# Altium PCB Shield_robottino_PCB.PcbDoc
Units mm, origin at the board's own origin, x right, y up, seen from the top; angles counter-clockwise.
Board outline 50 x 50 mm, 4 copper layers (Top Layer, Internal Plane 1, Internal Plane 2, Bottom Layer); 44 components, 46 nets, 185 pads, 90 vias.
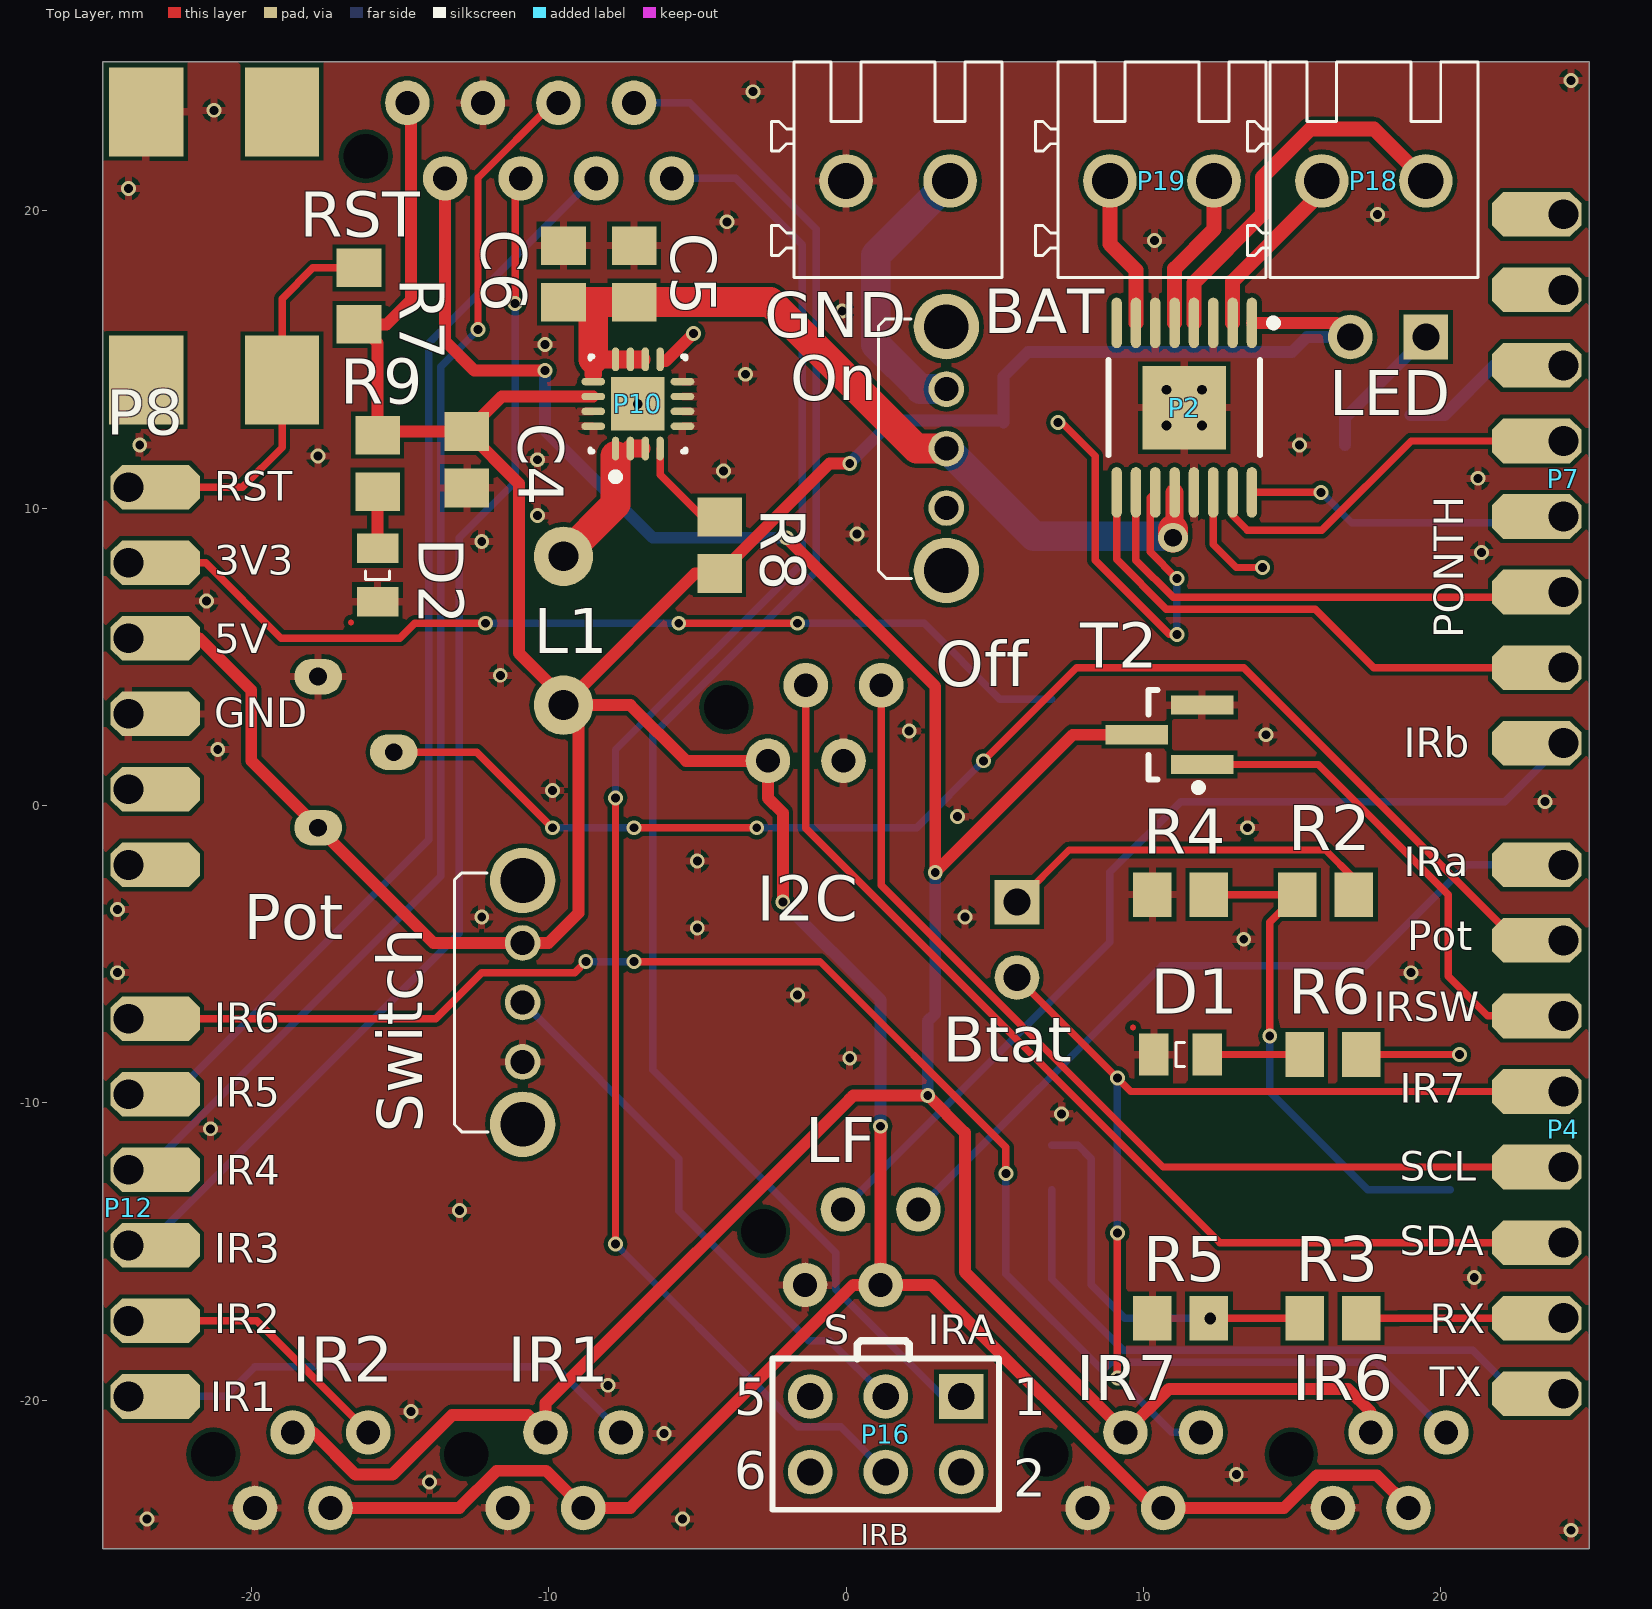
[diagram p0: Top Layer view]
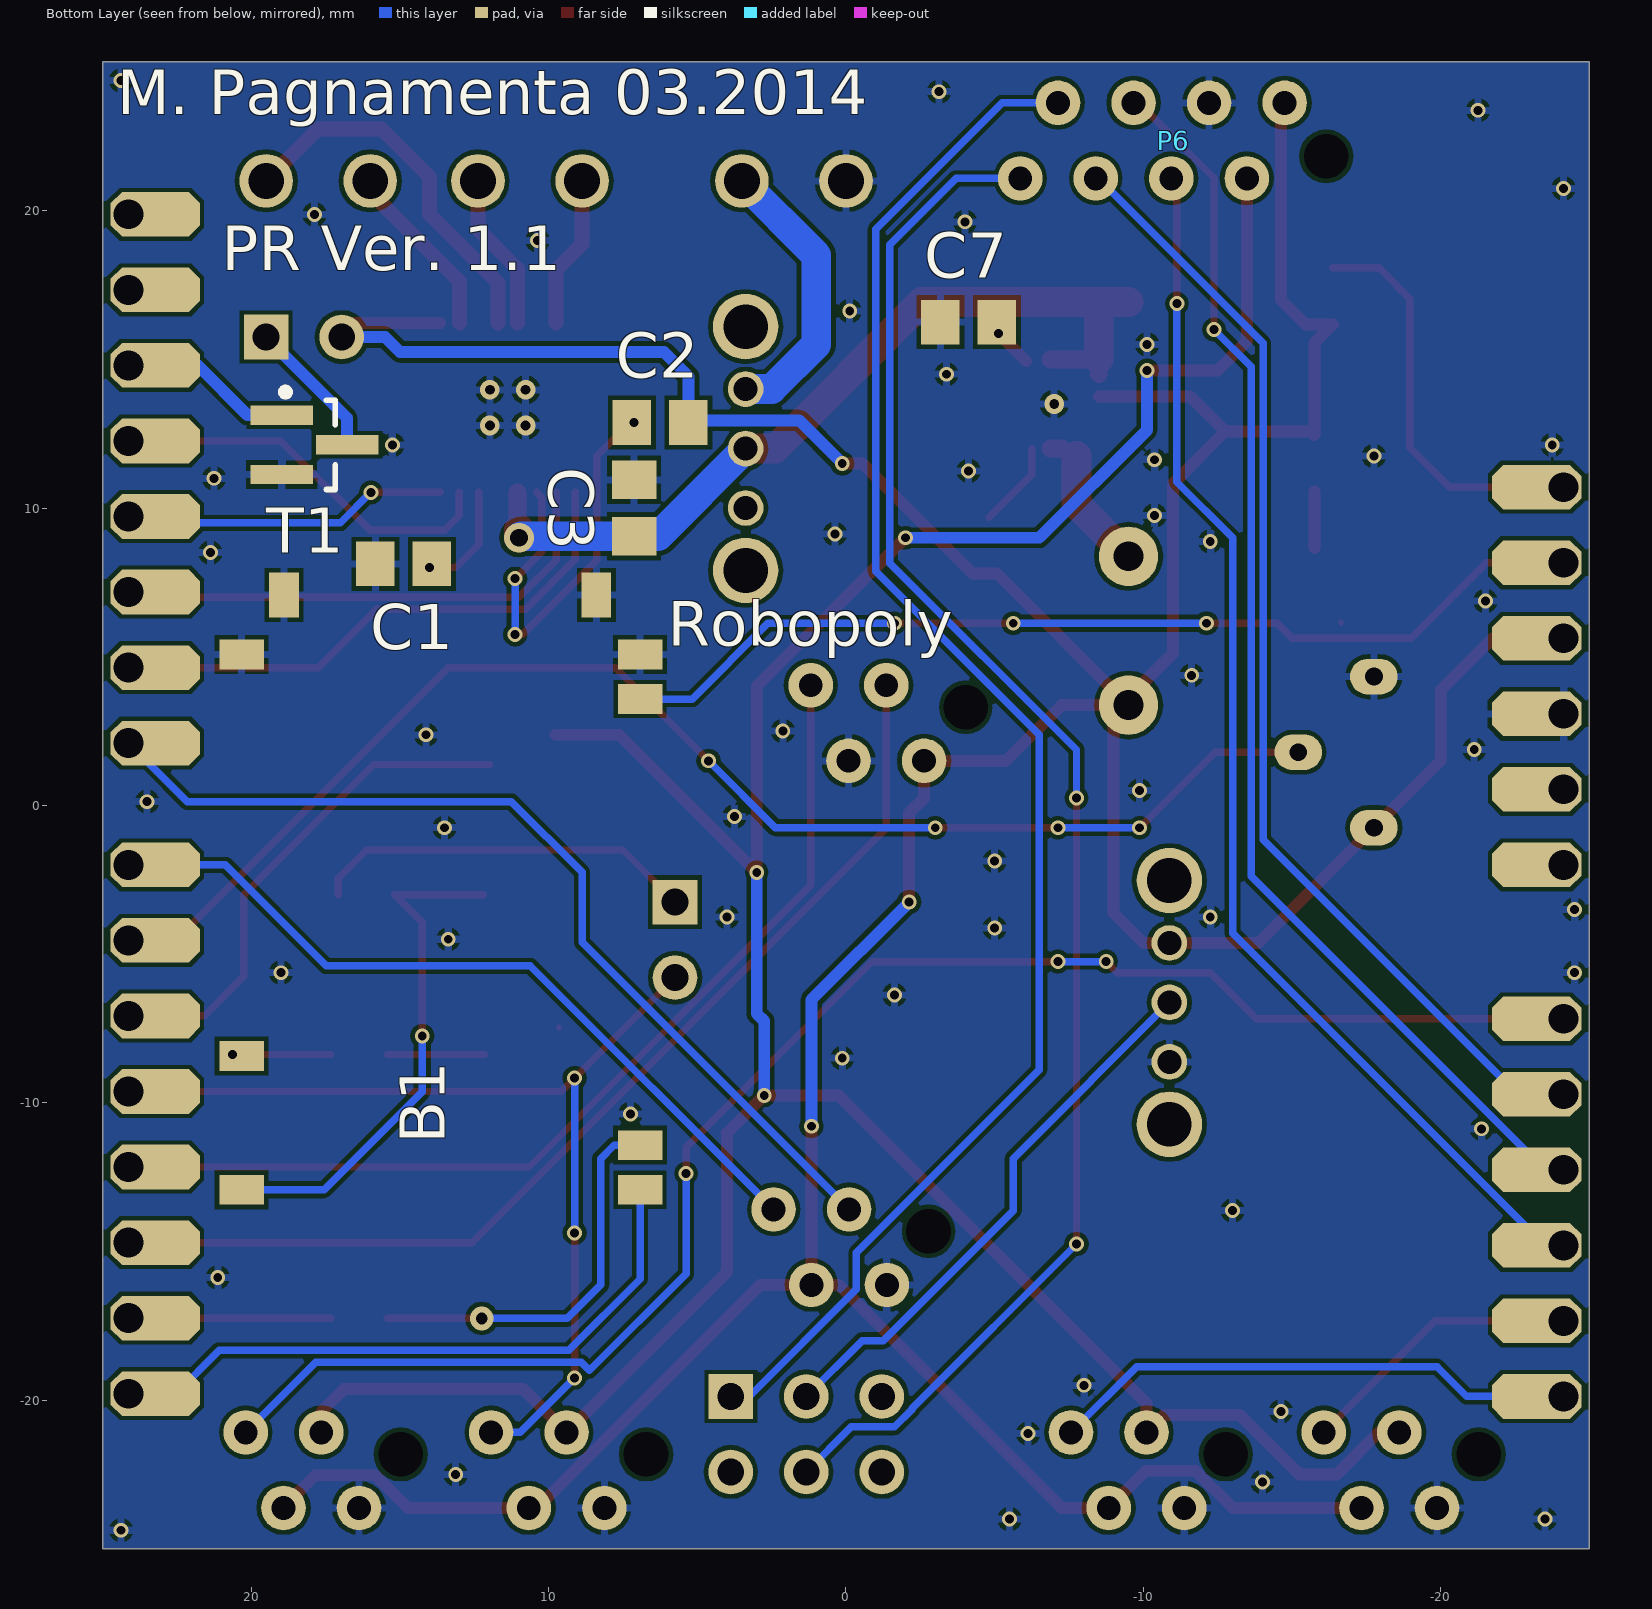
[diagram p1: Bottom Layer view, seen from below]
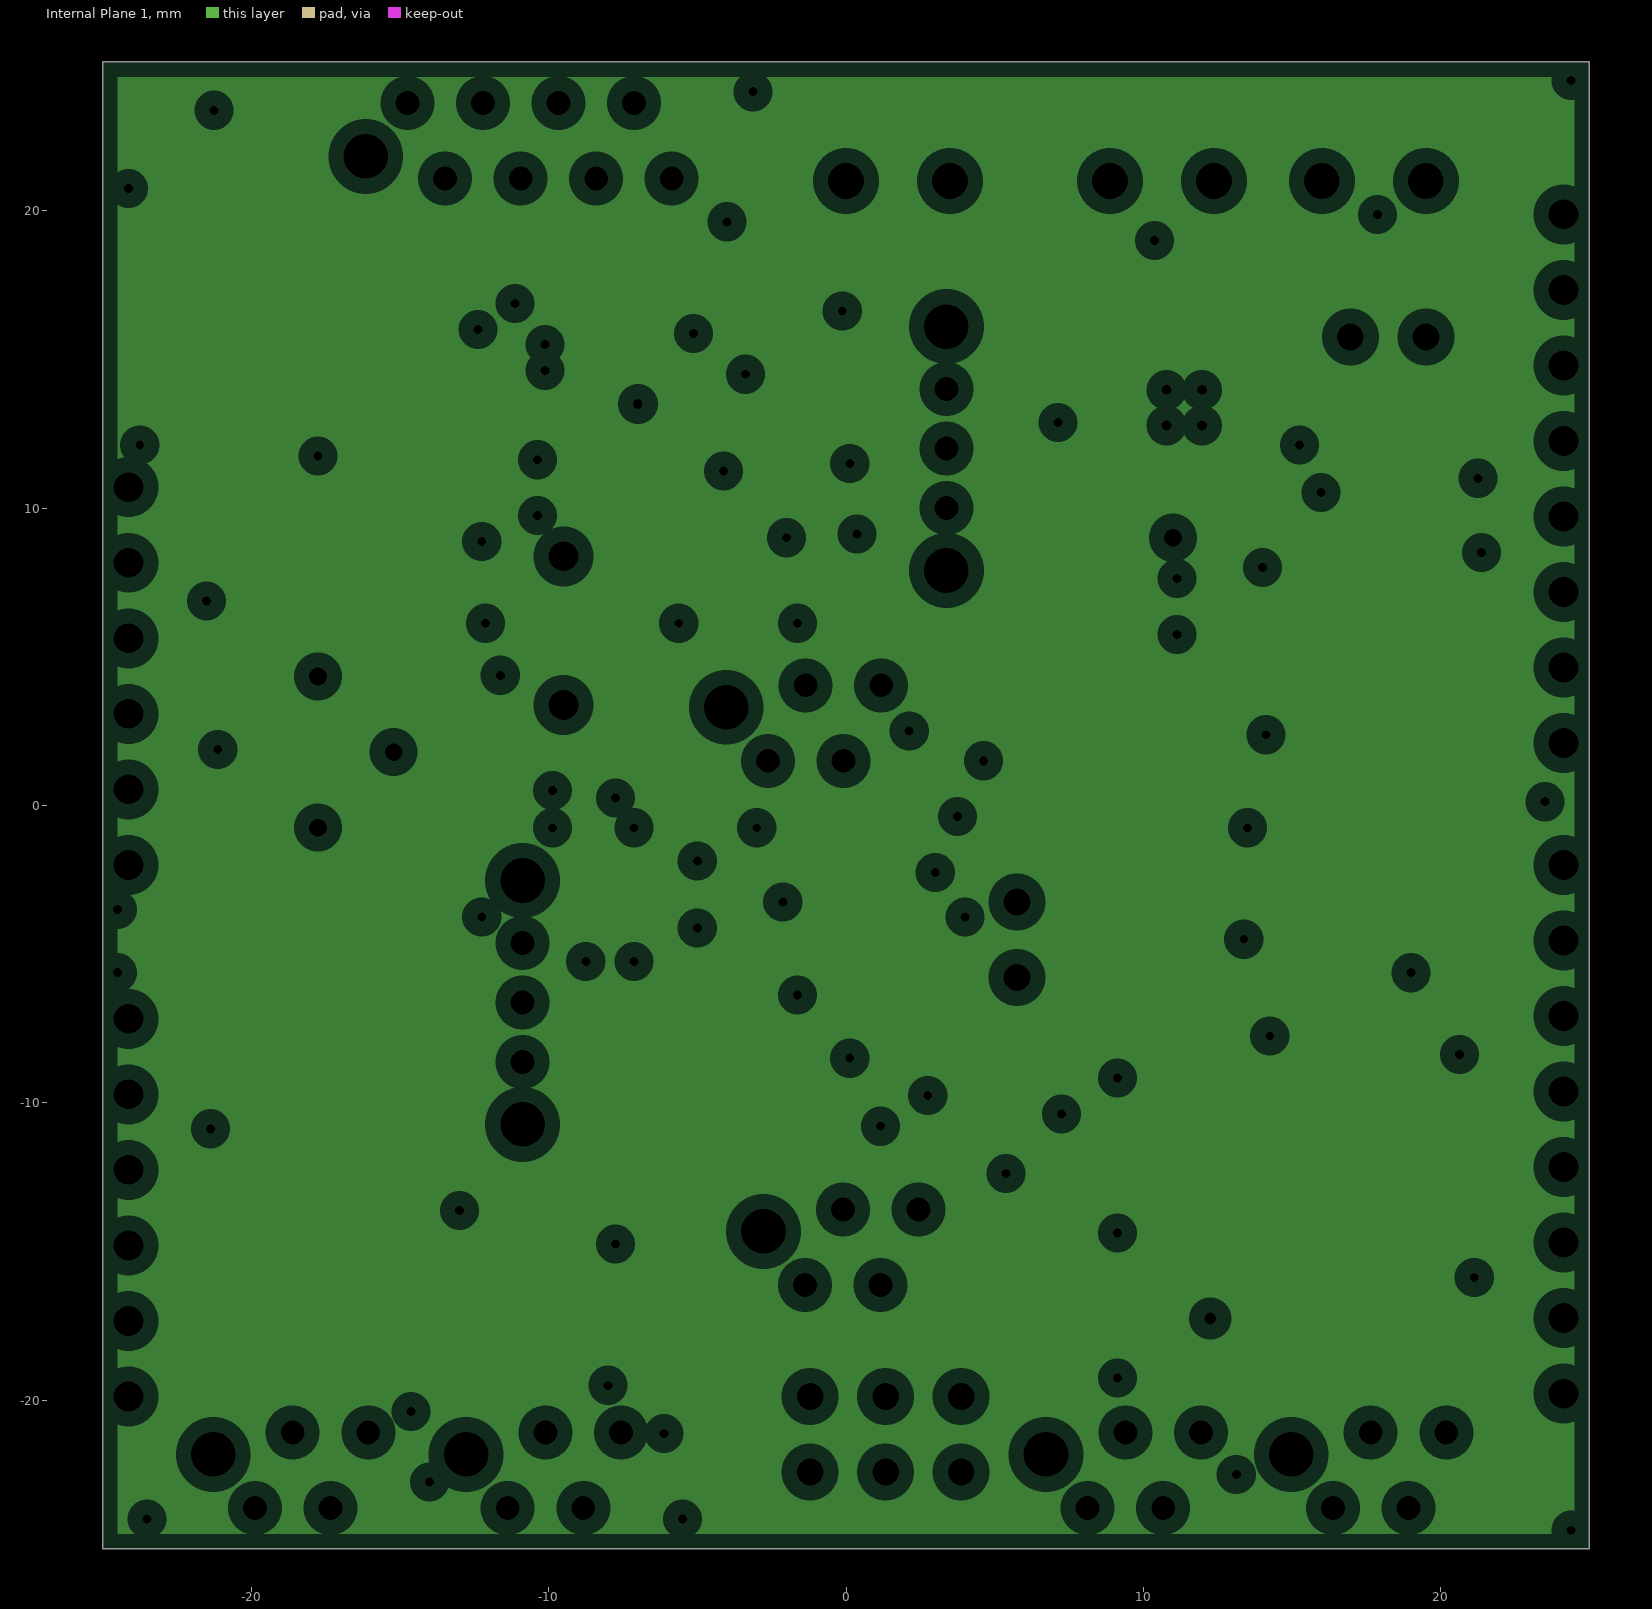
[diagram p2: Internal Plane 1, clearances drawn from the general rule]
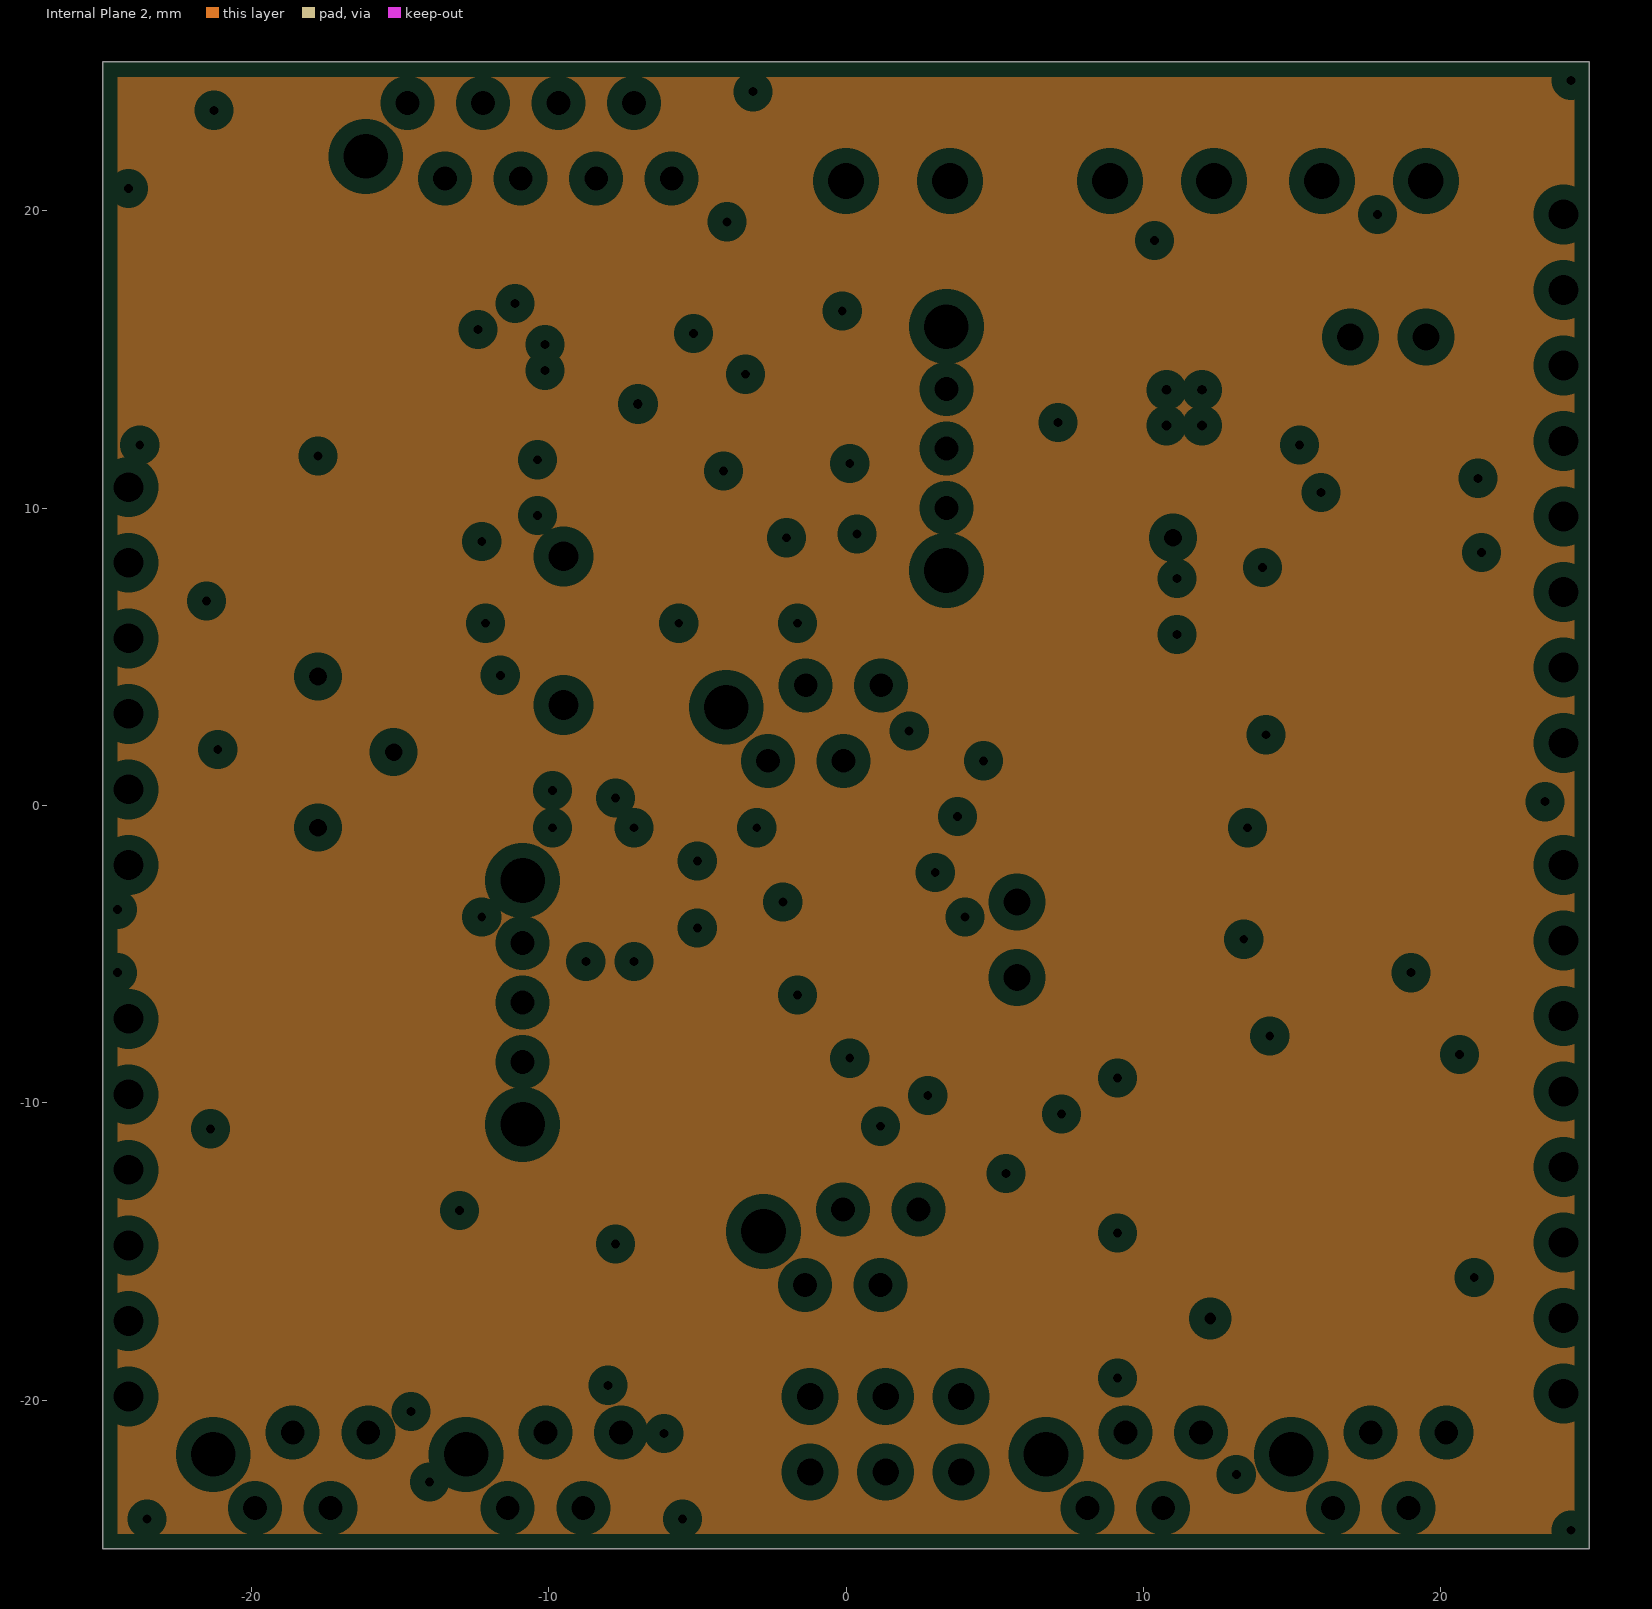
[diagram p3: Internal Plane 2, clearances drawn from the general rule]
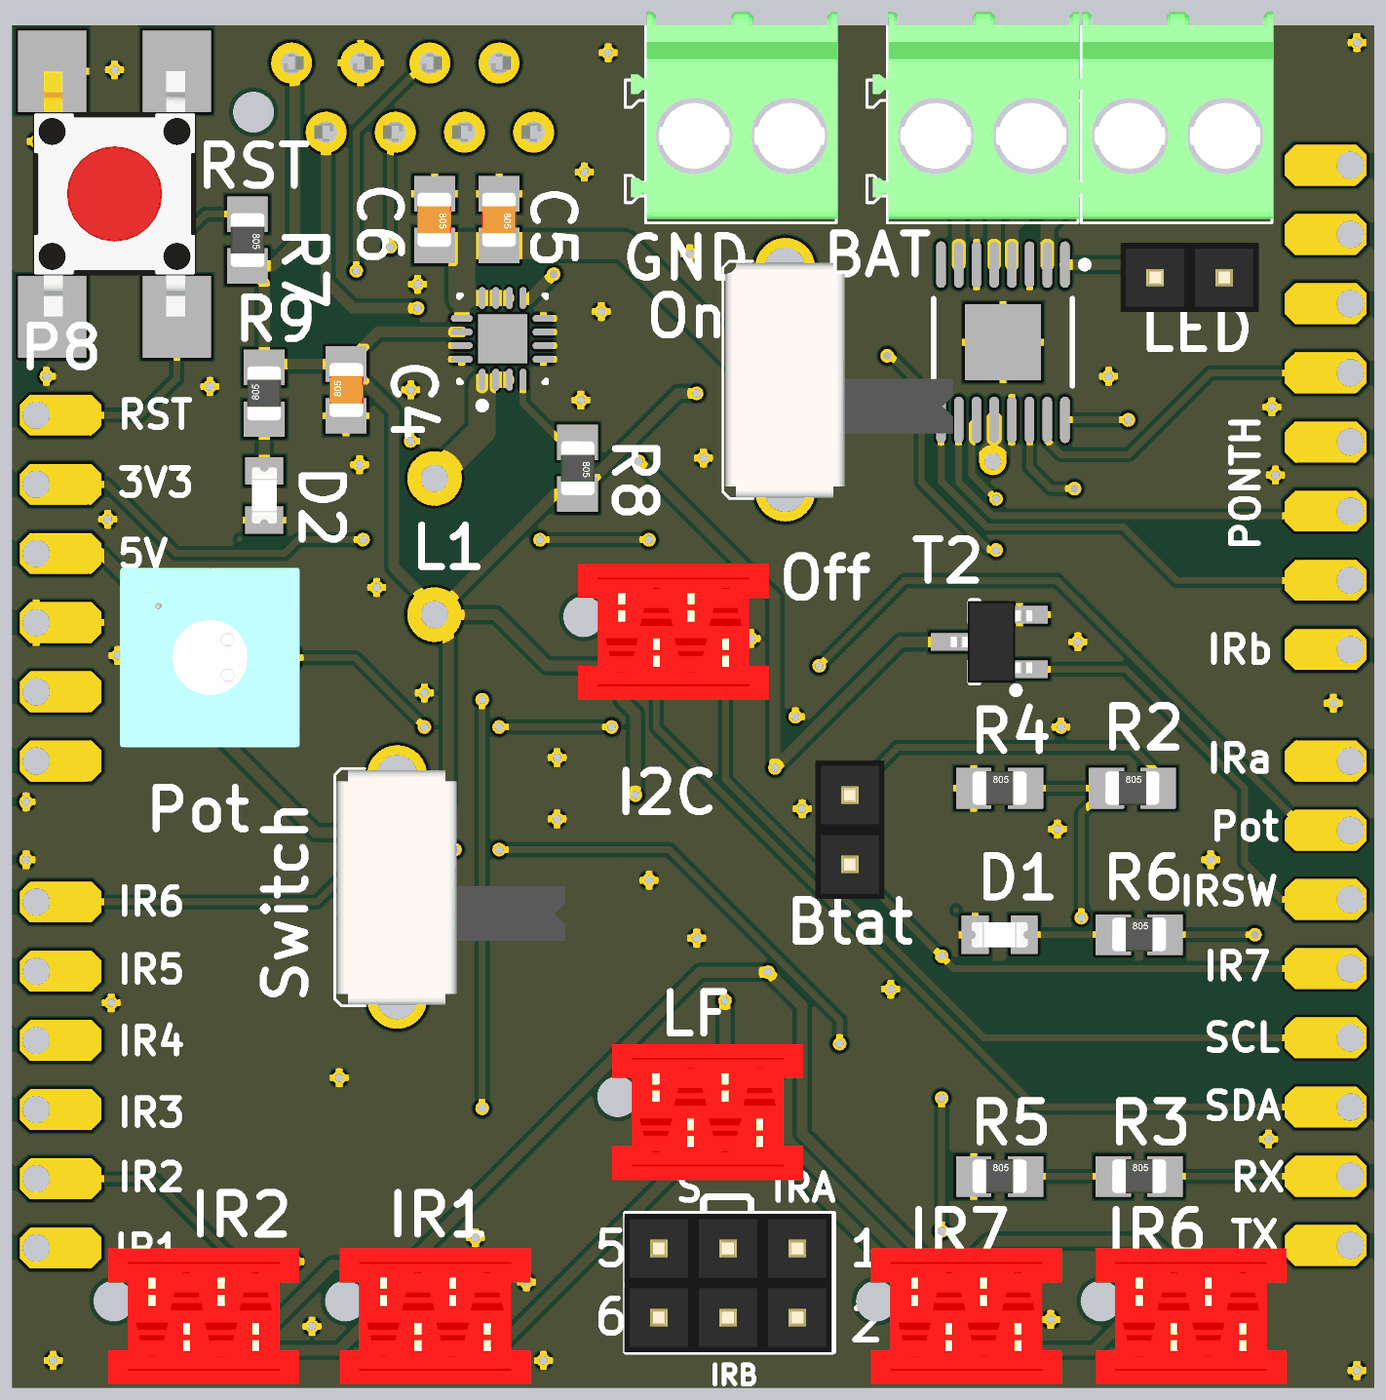
[diagram p4: 3D render of the assembled board from above, using the file's embedded part models]
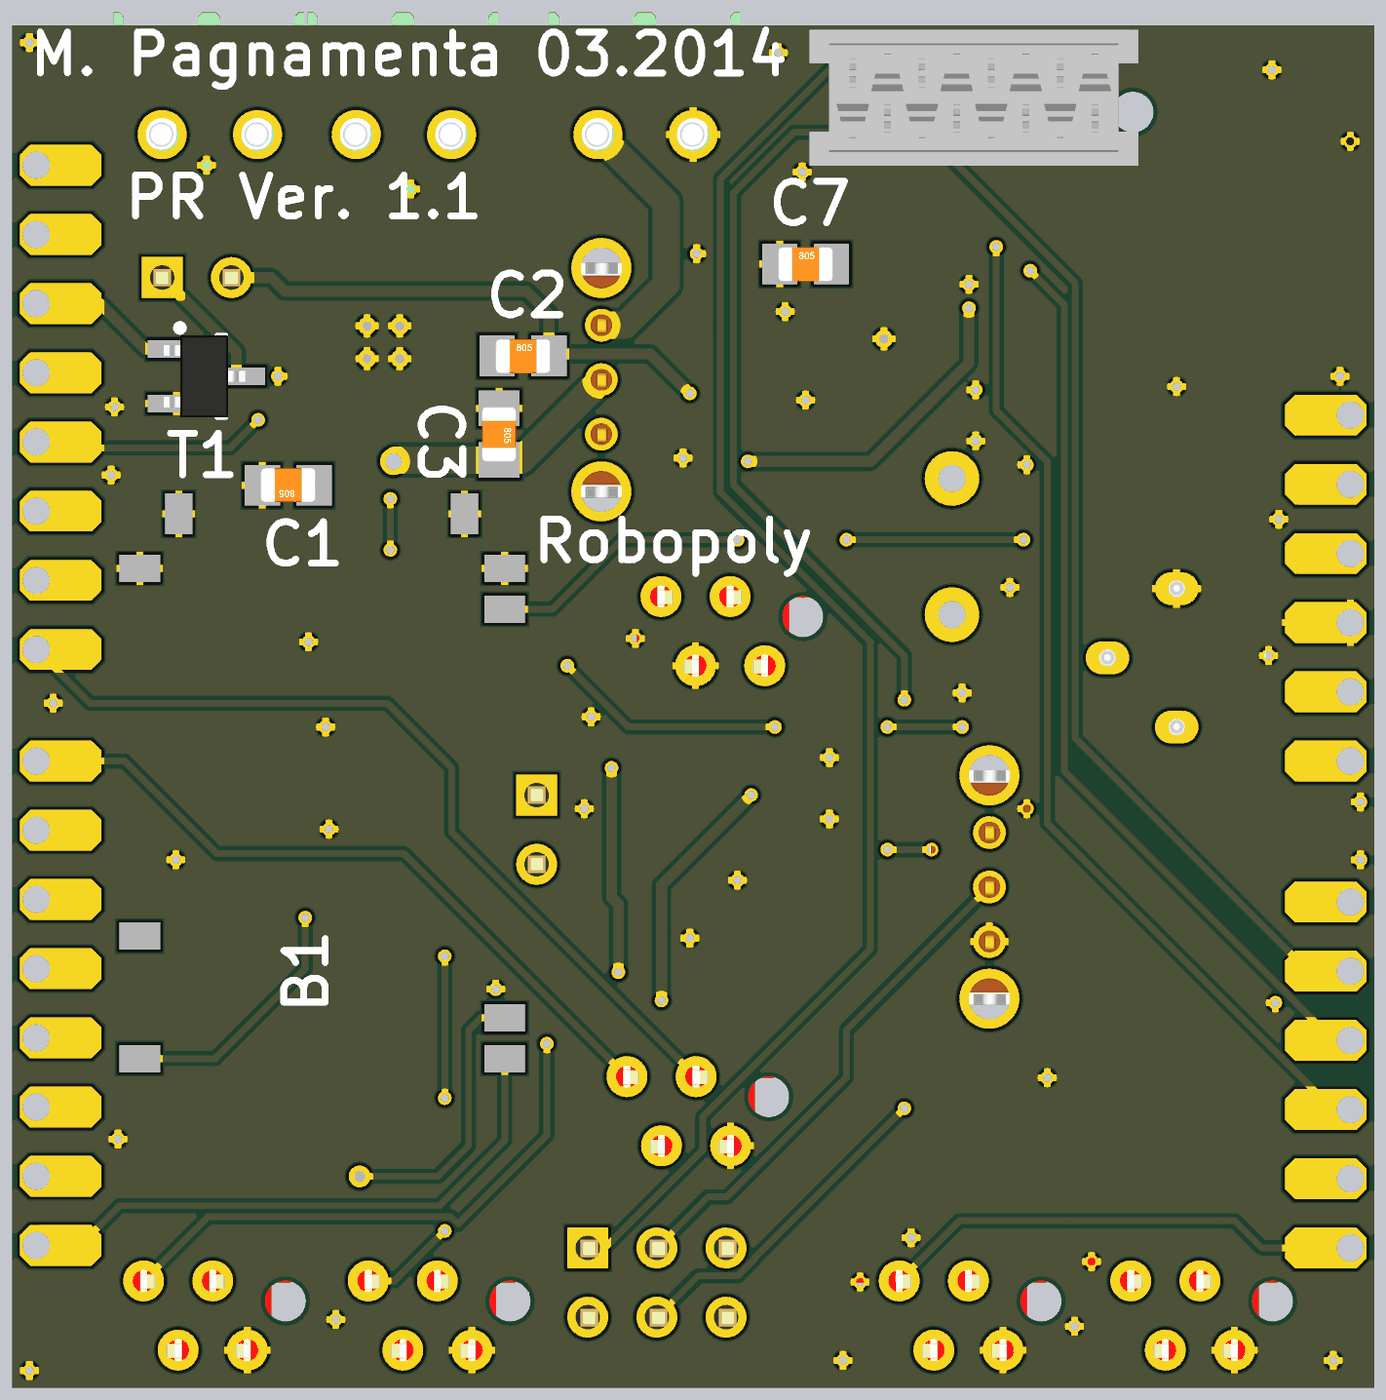
[diagram p5: 3D render of the assembled board from below, using the file's embedded part models]

## Layer stack, top to bottom
Top Layer: signal copper 0.0356
Dielectric: dielectric 0.32, FR-4, Dk 4.8
Internal Plane 1: plane copper 0.0356
Dielectric: dielectric 0.32, FR-4, Dk 4.8
Internal Plane 2: plane copper 0.0356
Dielectric: dielectric 0.32, FR-4, Dk 4.8
Bottom Layer: signal copper 0.0356

## Board outline
-25,-25 25,-25 25,25 -25,25

## Design rules (kind name [scope] priority, off if disabled: settings)
Clearance [All] p1: gap=0.15
PlaneClearance [All] p1: clearance=0.508
PlaneConnect [All] p1: planeconnectstyle=Direct reliefexpansion=0.508 reliefentries=4 reliefconductorwidth=0.254 reliefairgap=0.254
PolygonConnect PolygonConnect_nettie [InComponent('nt1') vs InNet('GND')] p1: connectstyle=Direct reliefconductorwidth=0.254 reliefentries=4 polygonreliefangle="90 Angle"
PolygonConnect PolygonConnect_pad [InComponent('U3') vs InNet('GND')] p2: connectstyle=Direct reliefconductorwidth=0.254 reliefentries=4 polygonreliefangle="90 Angle"
PolygonConnect [All] p3: connectstyle=Relief reliefconductorwidth=0.254 reliefentries=4 polygonreliefangle="90 Angle"
RoutingVias [All] p1: holewidth=0.35 width=0.6 viastyle="Through Hole" minholewidth=0.2 minwidth=0.4 maxholewidth=1.2 maxwidth=1
SilkscreenOverComponentPads [All] p1: minsilkscreentomaskgap=0.254
SolderMaskExpansion SolderMaskExpansion_via [IsVia] p1: expansion=-0.5
SolderMaskExpansion [All] p2: expansion=0.102
Width [All] p1: maxlimit=1 minlimit=0.203 preferedwidth=0.203
25 further rules are at their usual default settings.

## Components (designator, comment, footprint, x,y, rotation, side; value= is the part's Value field where it differs from the comment)
B1 "Bluetooth-RS232" Bluetooth_PRismino 12.75,-5.375 r0 bottom
Btat "Header 2" HEADER1x2 5.75,-3.25 r270 top (schematic designator P3)
C1 "C1" C/0805 14.875,8.125 r0 bottom
C2 "C2" C/0805 6.25,12.875 r180 bottom
C3 "C3" C/0805 7.125,10 r270 bottom
C4 "C4" C/0805 -12.75,11.625 r90 top
C5 "C6" C/0805 -7.125,17.875 r270 top
C6 "C7" C/0805 -9.5,17.875 r270 top
C7 "C5" C/0805 -4.125,16.25 r180 bottom
D1 "LED" LED-2012[0805] 11.25,-8.375 r0 top
D2 "LED" LED-2012[0805] -15.75,7.75 r90 top
GND "Terminal Block" "Phoenix PT 2-Pole" 0,21 r0 top (schematic designator P17)
I2C "I2C" TYCO/215079-4 -2.625,1.5 r180 top (schematic designator P1)
IR1 "I2C" TYCO/215079-4 -11.375,-23.625 r180 top (schematic designator P9)
IR2 "I2C" TYCO/215079-4 -19.875,-23.625 r180 top (schematic designator P13)
IR6 "I2C" TYCO/215079-4 16.375,-23.625 r180 top (schematic designator P15)
IR7 "I2C" TYCO/215079-4 8.125,-23.625 r180 top (schematic designator P11)
L1 "*" RL622-2R2K-RC -9.5,8.375 r270 top
LED "Header 2" HEADER1x2 19.5,15.75 r180 top (schematic designator P5)
LF "I2C" TYCO/215079-4 -1.375,-16.125 r180 top (schematic designator P14)
Off "SW/SPDT" SW/OS-SPDT 3.375,10 r90 top (schematic designator S1)
P2 "Header 2" DRV8833PWPR 11.375,13.375 r270 top
P4 "Header 8" "Arduino Pad 8" 24.125,-2 r180 top
P6 "Header 8" TYCO/215079-8 -14.75,23.625 r180 bottom
P7 "Header 8" "Arduino Pad 8" 24.125,19.875 r180 top
P8 "Header 6" "Arduino Pad 6" -24.125,-2 r0 top
P10 "Header 2" "TPS62133 - duplicate" -7,13.5 r90 top
P12 "Header 6" "Arduino Pad 6" -24.125,-19.875 r0 top
P16 "Header 3X2" HEADER2X3 3.875,-19.875 r180 top
P18 "Terminal Block" "Phoenix PT 2-Pole" 16,21 r0 top
P19 "Terminal Block" "Phoenix PT 2-Pole" 8.875,21 r0 top
Pot "POT_Bourns" POT/Bourns-3362P -17.75,-0.75 r90 top (schematic designator R1)
R2 "1kOhm" R/0805 16.125,-3 r0 top
R3 "1kOhm" R/0805 16.375,-17.25 r0 top
R4 "2kOhm" R/0805 11.25,-3 r0 top
R5 "2kOhm" R/0805 11.25,-17.25 r0 top
R6 "1kOhm" R/0805 16.375,-8.375 r0 top
R7 "1kOhm" R/0805 -15.75,11.5 r90 top
R8 "100kOhm" R/0805 -4.25,8.75 r270 top
R9 "10kOhm" R/0805 -16.375,17.125 r270 top
RST "SMD Switch" SMD_SW_Red -21.25,18.875 r90 top (schematic designator S3)
Switch "SW/SPDT" SW/OS-SPDT -10.875,-8.625 r90 top (schematic designator S2)
T1 "FDV305N" SOT23-3 17.875,12.125 r180 bottom
T2 "FDV305N" SOT23-3 10.875,2.375 r180 top

## Footprints (in the part's own frame and the unit in brackets; to place one, negate y for a bottom-side part, rotate by r counter-clockwise, add the part's x,y. Pads: shape width x height; smd on the part's side, far side on the other; paste and mask are expansions set on the pad)
"Arduino Pad 6" [mm]
  oct 3x1.5 hole 1 copper offset 0.9,0: 1(0,0) 2(0,2.54) 3(0,5.08) 4(0,7.62) 5(0,10.16) 6(0,12.7)
"Arduino Pad 8" [mm]
  oct 3x1.5 hole 1 copper offset 0.9,0: 1(0,0) 2(0,2.54) 3(0,5.08) 4(0,7.62) 5(0,10.16) 6(0,12.7) 7(0,15.24) 8(0,17.78)
Bluetooth_PRismino [mm]
  rect 1.5x1 smd: 1(-5.825,7.55) 2(-5.825,6.05) 12(-5.825,-8.95) 13(-5.825,-10.45) 22(7.575,-10.45) 31(7.575,3.05) 34(7.575,7.55)
  rect 1x1.5 smd: 14(-4.355,-12.45) 21(6.145,-12.45)
  body extent -5.68,-12.3 7.42,14.7, height 2
C/0805 [mm] "Chip Resistor; Body 2.0 x 1.3 mm (LxW typ)"
  rect 1.3x1.5 smd: 1(-0.95,0) 2(0.95,0)
  body extent -1,-0.64 1,0.61, height 0.78
DRV8833PWPR [mm] "Foot print of an Hbridge with termal pad"
  oval 1.7x0.35 smd: 1(-2.85,2.275) 2(-2.85,1.625) 3(-2.85,0.975) 4(-2.85,0.325) 5(-2.85,-0.325) 6(-2.85,-0.975) 7(-2.85,-1.625) 8(-2.85,-2.275) 9(2.85,-2.275) 10(2.85,-1.625) 11(2.85,-0.975) 12(2.85,-0.325) 13(2.85,0.325) 14(2.85,0.975) 15(2.85,1.625) 16(2.85,2.275)
  rect 2.8x2.8 smd: 17(0,0)
  silkscreen extent -2.97,-2.55 1.6,3.13, body extent -2.25,-2.55 2.25,2.55, height 1.2
HEADER1x2 [mm] "2.54mm Header"
  rect 1.5x1.5 hole 0.9: 1(0,0)
  round 1.5 hole 0.9: 2(2.54,0)
  body extent -1.27,-1.27 3.81,1.27, height 8.44
HEADER2X3 [mm] "Connector; Header; 3x2 Position"
  rect 1.5x1.5 hole 0.9: 1(0,0)
  round 1.5 hole 0.9: 2(0,2.54) 3(2.54,0) 4(2.54,2.54) 5(5.08,0) 6(5.08,2.54)
  silkscreen extent -1.27,-1.27 6.35,3.81, body extent -1.21,-1.25 6.41,3.83, height 8.44
LED-2012[0805] [mm] "SMD LED - 0805 package"
  rect 1x1.4 smd: A(0.9,0) K(-0.9,0)
  Top Layer lines w0.203: -1.6,0.9 -1.6,0.9
  silkscreen extent -0.15,-0.4 0.13,0.4, body extent -1.03,-0.46 1.03,0.45, height 0.84
"Phoenix PT 2-Pole" [mm] "PT 1,5/ 2-3,5-H - Ref 1984617"
  round 1.8 hole 1.2: 1(0,0) 2(3.5,0)
  silkscreen extent -2.5,-3.25 5.25,4, body extent -2.28,-3.1 5.29,4.5, height 9
POT/Bourns-3362P [mm] "1/4\" Trim Pot - through hole"
  oval 1.2x1.6 hole 0.6: 1(0,0) 2(2.54,-2.54) 3(5.08,0)
  body extent -0.75,-3.3 5.85,3.3, height 4.4
R/0805 [mm] "Chip Resistor; Body 2.0 x 1.3 mm (LxW typ)"
  rect 1.3x1.5 smd: 1(-0.95,0) 2(0.95,0)
  body extent -1,-0.62 1,0.64, height 0.78
RL622-2R2K-RC [mm]
  round 2 hole 1: 1(0,0) 2(5,0)
SMD_SW_Red [mm]
  rect 3x2.5 smd: 0(-4.572,2.286) 1(-4.572,-2.286) 2(4.445,2.286) 3(4.445,-2.286)
  body extent -4.56,-3 4.44,3, height 5
SOT23-3 [mm] "SOT23, 3-Leads, Body 3.0x2.6mm (max), Pitch 0.95mm, IPC Low Density"
  rect 2.1x0.65 smd: 1(-1.1,1) 2(-1.1,-1) 3(1.1,0)
  silkscreen extent -1.1,-1.5 0.7,1.9, body extent -1.57,-1.5 1.42,1.5, height 1.46
SW/OS-SPDT [mm] "OS102011MA1QS1"
  round 1.2 hole 0.8: 1(0,0) 2(2,0) 3(4,0)
  round 2.2 hole 1.5: ""(-2.1,0) ""(6.1,0)
  silkscreen extent -2.36,1.17 6.35,2.29, body extent -2.32,-6.16 6.29,2.21, height 4.7
"TPS62133 - duplicate" [mm]
  oval 0.8x0.25 smd: 1(-1.5,0.75) 2(-1.5,0.25) 3(-1.5,-0.25) 4(-1.5,-0.75) 9(1.5,-0.75) 10(1.5,-0.25) 11(1.5,0.25) 12(1.5,0.75)
  oval 0.25x0.8 smd: 5(-0.75,-1.5) 6(-0.25,-1.5) 7(0.25,-1.5) 8(0.75,-1.5) 13(0.75,1.5) 14(0.25,1.5) 15(-0.25,1.5) 16(-0.75,1.5)
  rect 1.8x1.8 smd: 17(0,0)
  silkscreen extent -2.57,-1.6 1.6,1.6, body extent -1.58,-1.58 1.58,1.58, height 1
TYCO/215079-4 [mm]
  round 1.5 hole 0.8: 1(0,0) 2(-1.27,-2.54) 3(-2.54,0) 4(-3.81,-2.54)
  round 1.3 hole 1.5 unplated: 5(1.4,-1.8)
  body extent -5.41,-3.74 1.6,1.26, height 4
TYCO/215079-8 [mm]
  round 1.3 hole 1.5 unplated: 0(1.4,-1.8)
  round 1.5 hole 0.8: 1(0,0) 2(-1.27,-2.54) 3(-2.54,0) 4(-3.81,-2.54) 5(-5.08,0) 6(-6.35,-2.54) 7(-7.62,0) 8(-8.89,-2.54)
  body extent -10.49,-3.77 1.6,1.23, height 4

## Part data
B1: "Bluetooth to RS232 Module"
Btat LED: "Header, 2-Pin"
C1 C2 C3 C4 C5 C6 C7: library part C, "Capacitor"
GND P18 P19: library part "Screw Block 2", "2-Pin Screw Terminal"
I2C IR1 IR2 IR6 IR7 LF: library part Micromatch-I2C, "Micromatch I2C Connector"
L1: library part L
Off Switch: library part SW-SPDT, "SPDT Subminiature Toggle Switch, Right Angle Mounting, Vertical Actuation"
P2: library part DRV8833PWPR, "Header, 2-Pin"
P4 P6 P7: "Header, 8-Pin"
P8 P12: "Header, 6-Pin"
P10: library part TPS62133, "Header, 2-Pin"
P16: "Header, 3-Pin, Dual row"
Pot: "Potentiometer"
R2 R3 R4 R5 R6 R7 R8 R9: library part R, "Resistor"
RST: "Switch"
T1 T2: library part T/FDV305N, "MOSFET N SOT-23 20V 220mOhm"

## Via types
v1: diameter 0.5, hole 0.3, Top Layer to Bottom Layer, 83 vias
v2: diameter 0.66, hole 0.33, Top Layer to Bottom Layer, tented top, 5 vias
v3: diameter 1, hole 0.6, Top Layer to Bottom Layer, 1 vias
v4: diameter 0.8, hole 0.4, Top Layer to Bottom Layer, 1 vias

## Nets (pads, with @x,y where several pads share a name; then routed paths per layer and width w, separated by ;. In a path a pad name is that pad's centre, name@x,y a point inside that pad or via, vN(x,y) a via of type N, cw(c..) or ccw(c..) an arc to the next point about the centre after c; other vN are vias at no path point)
3V3: B1.12 P8.5 | length 33.4
  Top Layer w0.25: P8.5 -21.535,8.16 -19,5.625 -15,5.625 -14.5,6.125 v1(-12.125,6.125) ; v1(-5.625,6.125) v1(-1.625,6.125)
  Bottom Layer w0.25: v1(-12.125,6.125) v1(-5.625,6.125) ; v1(-1.625,6.125) 2.625,6.125 5.175,3.575 B1.12
AIN1: P2.16 P7.5 | length 11
  Top Layer w0.25: P2.16 v1(15.975,10.525)
  Bottom Layer w0.25: v1(15.975,10.525) 17,9.5 23.91,9.5 P7.5
AIN2: P2.15 P7.4 | length 13.4
  Top Layer w0.25: P2.15 13,9.75 13.5,9.25 16,9.25 19.005,12.255 P7.4
AOUT1: P2.2 P18.1 | length 6
  Top Layer w0.5: P2.2 13,17.625 16,20.625 P18.1
AOUT2: P2.4 P18.2 | length 12.8
  Top Layer w0.5: P2.4 11.7,17.575 14,19.875 14,21.125 15.625,22.75 17.75,22.75 P18.2
BIN1: P2.9 P7.7 | length 18.8
  Top Layer w0.25: P2.9 9.1,8.275 10.775,6.6 15.775,6.6 17.74,4.635 P7.7
BIN2: P2.10 P7.6 | length 17.2
  Top Layer w0.25: P2.10 9.75,8.25 11,7 23.95,7 P7.6
BOUT1: P2.7 P19.1 | length 5.1
  Top Layer w0.5: P19.1 8.875,18.875 9.75,18 P2.7
BOUT2: P2.5 P19.2 | length 5.3
  Top Layer w0.5: P2.5 11.05,18.05 12.375,19.375 P19.2
GND: B1.13 B1.14 B1.21 B1.22 C1.2 C3.1 C4.1 C5.1 C6.1 C7.1 D1.K D2.K GND.1 I2C.3 IR1.1 IR2.1 IR6.1 IR7.1 LF.1 P2.3 P2.6 P2.13 P2.17 P6.3 P8.3 P10.5 P10.6 P10.7 P10.8 P10.15 P10.16 P10.17 Pot.3 R4.1 R5.1 RST.2 Switch.1 T1.2 T2.2
  other v1: 24.375,-24.375 -23.5,-24 -5.5,-24 -14,-22.75 13.125,-22.5 -6.125,-21.125 -14.625,-20.375 -8,-19.5 21.125,-15.875 -13,-13.625 -21.375,-10.875 7.25,-10.375 0.125,-8.5 -1.625,-6.375 -24.5,-5.625 19,-5.625 13.375,-4.5 -5,-4.125 -12.25,-3.75 4,-3.75 -24.5,-3.5 -5,-1.875 13.5,-0.75 3.75,-0.375 23.5,0.125 -9.875,0.5 -21.125,1.875 14.125,2.375 2.125,2.5 -11.625,4.375 -21.5,6.875 21.375,8.5 -12.25,8.875 0.375,9.125 -10.375,9.75 21.25,11 -4.125,11.25 -10.375,11.625 -17.75,11.75 -23.75,12.125 15.25,12.125 -3.375,14.5 -10.125,15.5 -0.125,16.625 10.375,19 -4,19.625 17.875,19.875 -24.125,20.75 -21.25,23.375 -3.125,24 24.375,24.375
  other v2: 10.775,12.775 11.975,12.775 -7,13.5 10.775,13.975 11.975,13.975
IR1: IR1.4 P12.1 | length 17.9
  Bottom Layer w0.25: P12.1 -20.875,-19.875 -19.875,-18.875 -9.775,-18.875 IR1.4
IR2: IR2.4 P12.2 | length 9.6
  Top Layer w0.25: P12.2 -19.815,-17.335 IR2.4
IR3: P6.4 P12.3 | length 41.7
  Top Layer w0.25: v1(-11.125,16.875) -11.125,20.9 P6.4
  Bottom Layer w0.25: P12.3 -23.501,-14.795 -13,-4.294 -13,9 -11.125,10.875 v1(-11.125,16.875)
IR4: P6.5 P12.4 | length 42.3
  Top Layer w0.25: v1(-12.375,16) -12.375,21.1 -9.85,23.625 P6.5
  Bottom Layer w0.25: P12.4 -23.501,-12.255 -13.625,-2.379 -13.625,14.75 v1(-12.375,16)
IR5: P6.6 P12.5 | length 38.3
  Bottom Layer w0.25: P12.5 -22.59,-9.715 -14.025,-1.15 -14.025,15.541 -8.481,21.085 P6.6
IR6: IR6.4 P12.6 | length 54.4
  Top Layer w0.25: P12.6 -13.8,-7.175 -12.25,-5.625 -9.125,-5.625 v1(-8.75,-5.25) ; v1(-7.125,-5.25) -0.875,-5.25 5.375,-11.5 v1(5.375,-12.375)
  Bottom Layer w0.25: v1(-8.75,-5.25) v1(-7.125,-5.25) ; v1(5.375,-12.375) 5.375,-15.75 8.625,-19 8.633,-19 8.908,-18.725 17.825,-18.725 IR6.4
IR7: Btat.2 IR7.4 P4.4 | length 33.6
  Top Layer w0.25: Btat.2 v1(9.125,-9.165) 9.58,-9.62 P4.4 ; v1(9.125,-19.25) v1(9.125,-14.375)
  Bottom Layer w0.25: v1(9.125,-19.25) 10.96,-21.085 IR7.4 ; v1(9.125,-14.375) v1(9.125,-9.165)
IR_ON/OFF: P4.3 T2.1 | length 17.3
  Top Layer w0.25: T2.1 15.875,1.375 20.25,-3 20.25,-5.75 21.58,-7.08 P4.3
IR_SOURCE: IR1.2 IR2.2 IR6.2 IR7.2 P6.2 T2.3 | length 102.7
  Top Layer w0.4: IR2.2 -17.915,-21.085 -16.5,-22.5 -15.25,-22.5 -13.25,-20.5 -10.69,-20.5 IR1.2 -10.105,-20.099 0.119,-9.875 ; P6.2 -13.48,15.605 -12.5,14.625 v1(-10.125,14.625) ; v1(-2,9) 3,4 v1(3,-2.25) 7.625,2.375 T2.3 ; 0.125,-9.875 0.119,-9.875 ; IR6.2 17.645,-20.395 16.875,-19.625 10.855,-19.625 IR7.2 4,-15.69 4,-11 v1(2.75,-9.75) 0.244,-9.75 0.119,-9.875
  Bottom Layer w0.4: v1(-10.125,14.625) -10.125,12.625 -6.5,9 v1(-2,9) ; v1(2.75,-9.75) 2.75,-7.25 3,-7 v1(3,-2.25)
IRA: P6.7 P16.1 | length 54.1
  Bottom Layer w0.25: P6.7 -5.25,23.625 -1,19.375 -1,7.875 -6.5,2.375 -6.5,-8.895 -0.35,-15.045 -0.35,-16.275 3.25,-19.875 P16.1
IRAA: LF.4 P4.1 | length 26.5
  Bottom Layer w0.25: LF.4 10.625,-5.395 17.48,-5.395 20.875,-2 P4.1
IRB: P6.8 P16.4 | length 53.8
  Top Layer w0.25: v1(-7.75,-14.75) v1(-7.75,0.25)
  Bottom Layer w0.25: v1(-7.75,-14.75) -2.23,-20.27 -2.23,-20.3 -1.63,-20.9 -0.18,-20.9 P16.4 ; v1(-7.75,0.25) -7.75,1.875 -1.475,8.15 -1.475,18.85 -3.71,21.085 P6.8
IRBB: LF.2 P7.8 | length 32.1
  Bottom Layer w0.25: LF.2 8.875,-4.605 8.875,-2.25 11.25,0.125 22.155,0.125 P7.8
NetB1_2: B1.2 R3.1 R5.2 | length 13.5
  Top Layer w0.25: R5.2 R3.1
  Bottom Layer w0.25: B1.2 7.8,-11.425 8.25,-11.875 8.25,-16.125 9.375,-17.25 v4(12.25,-17.25)
NetB1_31: B1.31 R6.2 | length 3.4
  Top Layer w0.25: R6.2 v1@20.75,-8.375
  other v1: 20.625,-8.375
NetB1_34: B1.34 R2.1 R4.2 | length 17.4
  Top Layer w0.25: R4.2 R2.1 14.25,-3.925 v1(14.25,-7.75)
  Bottom Layer w0.25: v1(14.25,-7.75) 14.25,-9.625 17.55,-12.925 B1.34
NetC1_1: C1.1 P2.14 | length 3.7
  Top Layer w0.25: P2.14 12.35,8.775 13.125,8 v1(14,8)
NetC2_1: C2.1 P2.11 | length 14.2
  Top Layer w0.25: v1(7.125,12.875) 7.25,12.875 8.375,11.75 8.375,8.25 10.875,5.75 v1(11.125,5.75) ; P2.11 10.225,10.35 10.225,8.525 v1(11.125,7.625)
  Bottom Layer w0.25: v1(11.125,5.75) v1(11.125,7.625)
NetC7_2: C7.2 P10.9 | length 1.3
  Top Layer w0.4: -6.063,14.937 v1(-5.125,15.875)
NetD1_A: D1.A R6.1 | length 3.3
  Top Layer w0.25: D1.A R6.1
NetD2_A: D2.A R7.1 | length 1.9
  Top Layer w0.4: D2.A R7.1
NetL1_1: L1.1 P10.1 P10.2 P10.3 | length 4.5
  Top Layer w0.6: P10.2 P10.3@-6.875,12
  Top Layer w1: L1.1 -7.75,10.125 P10.1@-7.75,11.75
NetP3_1: Btat.1 R2.2 | length 13
  Top Layer w0.25: Btat.1 7.5,-1.5 16.125,-1.5 17.075,-2.45 R2.2
NetP5_1: LED.1 T1.3 | length 4.8
  Bottom Layer w0.4: T1.3 16.775,13.025 LED.1
NetP10_4: P10.4 R8.1 | length 2.9
  Top Layer w0.25: P10.4 -6.25,11.125 R8.1@-4.813,9.688
POT: P4.2 Pot.2 | length 46.4
  Top Layer w0.25: Pot.2 -12.415,1.79 v1(-9.875,-0.75) ; v1(-7.125,-0.75) v1(-3,-0.75) ; v1(4.625,1.5) 7.75,4.625 13.375,4.625 22.54,-4.54 P4.2
  Bottom Layer w0.25: v1(-9.875,-0.75) v1(-7.125,-0.75) ; v1(-3,-0.75) 2.375,-0.75 v1(4.625,1.5)
POWER_LED: P7.3 T1.1 | length 5.8
  Bottom Layer w0.4: T1.1 20.125,13.125 21.795,14.795 P7.3
RST: P8.6 R9.1 RST.1 | length 13.7
  Top Layer w0.25: P8.6 -20.3,10.7 -18.964,12.036 RST.1 -18.964,17.036 -17.925,18.075 R9.1
RX: P4.7 R3.2 | length 6.8
  Top Layer w0.25: R3.2 18.575,-17.25 18.585,-17.24 P4.7
SCL: I2C.4 P4.5 | length 33.6
  Top Layer w0.25: I2C.4 1.185,-2.685 10.66,-12.16 P4.5
SDA: I2C.2 P4.6 | length 36.1
  Top Layer w0.25: I2C.2 -1.355,-0.77 12.575,-14.7 P4.6
SWITCH: P16.3 Switch.2 | length 18.7
  Bottom Layer w0.25: Switch.2 -5.625,-11.875 -5.625,-13.625 -1.25,-18 -0.54,-18 P16.3
TX: B1.1 P4.8 | length 21.8
  Bottom Layer w0.25: B1.1 6.925,-15.925 9.325,-18.325 21.075,-18.325 22.53,-19.78 P4.8
VCC: C2.2 C4.2 I2C.1 IR1.3 IR2.3 IR6.3 IR7.3 L1.2 LED.2 LF.3 P2.1 P6.1 P8.4 P10.14 Pot.1 R7.2 R8.2 R9.2 Switch.3 | length 166.9
  Top Layer w0.4: P8.4 -21.745,5.62 -20,3.875 -20,1.5 Pot.1 -13.875,-4.625 Switch.3 -10,-4.625 -9,-3.625 -9,2.875 L1.2 ; IR2.3 -13,-23.625 -11.75,-22.375 -10.085,-22.375 IR1.3 -7.25,-23.625 0.25,-16.125 LF.3 ; P6.1@-14.625,23.75 -14.625,17 -15.45,16.175 R9.2 -15.75,15.55 R7.2 -15.625,12.575 C4.2 ; P10.14 -11.575,13.75 C4.2 ; v1(-2.125,-3.25) -2.125,-0.25 -2.625,0.25 I2C.1 -5.375,1.5 -7.25,3.375 L1.2 ; v1(0.125,11.5) -0.55,11.5 R8.2 -5.075,7.8 L1.2 ; v1(1.165,-10.79) LF.3 ; P2.1 16.485,16.225 LED.2 ; IR6.3 18.915,-23.59 17.85,-22.525 15.831,-22.525 14.731,-23.625 IR7.3 10.375,-23.625 2.875,-16.125 LF.3 ; C4.2 -11,10.825 -11,5.125 -9.5,3.625 L1.2
  Bottom Layer w0.4: v1(-2.125,-3.25) 1.165,-6.54 v1(1.165,-10.79) ; v1(0.125,11.5) 1.575,12.95 5.225,12.95 C2.2 5.3,14.425 6.125,15.25 15,15.25 15.5,15.75 LED.2
VM: C3.2 C5.2 C6.2 Off.2 P2.12 P10.10 P10.11 P10.12 P10.13 | length 29.6
  Top Layer w0.6: -8.5,14.5 -8.5,15 P10.12 P10.11 P10.10@-6.875,15 ; v3(11,9) 11.05,9.05 P2.12
  Top Layer w1: C6.2 -8.5,16.925 ; -8.5,15 -8.5,16.925 ; Off.2 2.375,12 -2.55,16.925 C5.2 -8.5,16.925 ; v3(11,9) v3@11,9.283
  Bottom Layer w1: Off.2 6.325,9.05 C3.2 v3@10.925,9.05
VMA: GND.2 Off.3 | length 9.5
  Bottom Layer w1: Off.3 2.5,14 1,15.5 1,18.5 GND.2
pads on no net: I2C.5 IR1.5 IR2.5 IR6.5 IR7.5 LF.5 Off. Off.1 P2.8 P6.0 P7.1 P7.2 P8.1 P8.2 P16.2 P16.5 P16.6 RST.0 RST.3 Switch.

## Polygon pours and split planes (outlines as drawn)
GND on Bottom Layer "Top Layer-No Net" (solid, remove dead copper, pour order 6): -25,25 25,25 25,-25 -25,-25
GND on Top Layer "Top Layer-No Net" (solid, remove dead copper, pour order 4): -25,25 -25,-25 25,-25 25,25
no net on Internal Plane 1 (split plane): 24.49,-24.49 -24.49,-24.49 -24.49,24.49 24.49,24.49
no net on Internal Plane 2 (split plane): 24.49,-24.49 -24.49,-24.49 -24.49,24.49 24.49,24.49

## Silkscreen, mask and mechanical layers (free items; w line width, h text height)
Top Overlay:
  lines w0.254: 0.375,-18.605 0.375,-18.125 0.5,-18 2,-18 2.125,-18.125 2.125,-18.605
  text "BAT" at 4.625,15.875 h1.5
  text "On" at -1.875,13.625 h1.5
  text "RST" at -21.25,10.25 h1
  text "3V3" at -21.25,7.75 h1
  text "PONTH" at 20.75,5.625 h1 r90
  text "5V" at -21.25,5.125 h1
  text "GND" at -21.25,2.625 h1
  text "IRb" at 18.75,1.625 h1
  text "IRa" at 18.75,-2.375 h1
  text "Pot" at 18.875,-4.875 h1
  text "IRSW" at 17.75,-7.25 h1
  text "IR6" at -21.25,-7.625 h1
  text "IR7" at 18.625,-10 h1
  text "IR5" at -21.25,-10.125 h1
  text "SCL" at 18.625,-12.625 h1
  text "IR4" at -21.25,-12.75 h1
  text "SDA" at 18.625,-15.125 h1
  text "IR3" at -21.25,-15.375 h1
  text "IR2" at -21.25,-17.75 h1
  text "RX" at 19.625,-17.75 h1
  text "S" at -0.75,-18.125 h1
  text "IRA" at 2.75,-18.125 h1
  text "TX" at 19.625,-19.875 h1
  text "IR1" at -21.375,-20.375 h1
  text "IRB" at 0.5,-24.875 h0.7
Bottom Overlay:
  text "M. Pagnamenta 03.2014" at 24.5,23.25 h1.5
  text "PR Ver. 1.1" at 21,18 h1.5
  text "Robopoly" at 6,5.375 h1.5
Mechanical 1:
  the board outline again, w0.254

## Text inside footprints (layer, text, board x,y; h text height)
P16: Top Overlay "6" at -3.75,-23 h1.27; Top Overlay "5" at -3.75,-20.5 h1.27; Top Overlay "2" at 5.625,-23.25 h1.27; Top Overlay "1" at 5.625,-20.5 h1.27